# Altium PCB adapter.PcbDoc
Units mm, origin at the board's own origin, x right, y up, seen from the top; angles counter-clockwise.
Board outline 42 x 40 mm, 2 copper layers (Top Layer, Bottom Layer); 20 components, 28 nets, 117 pads, 31 vias.
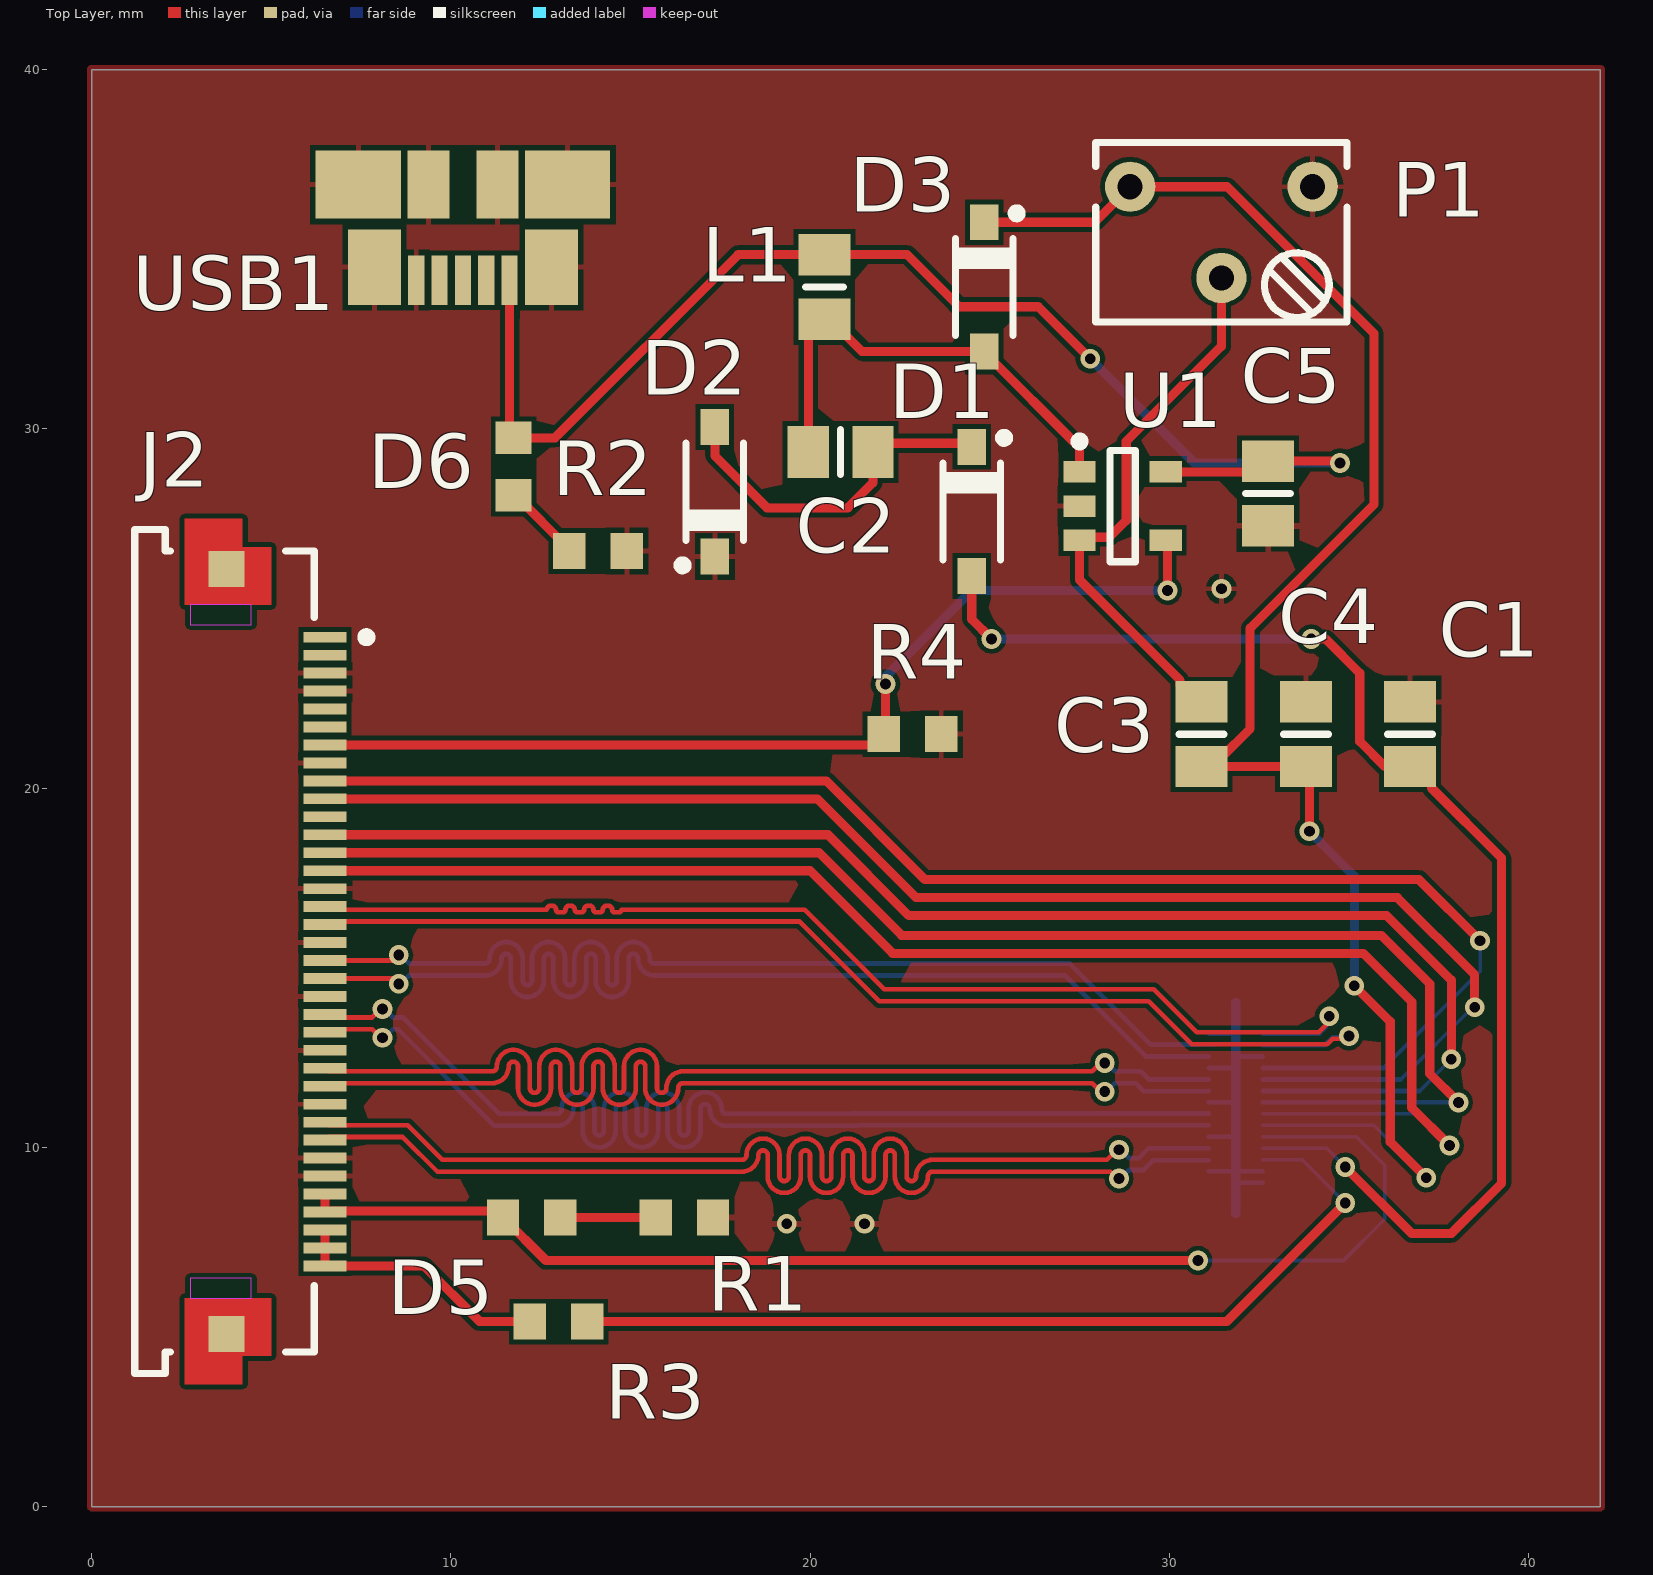
[diagram p0: Top Layer view]
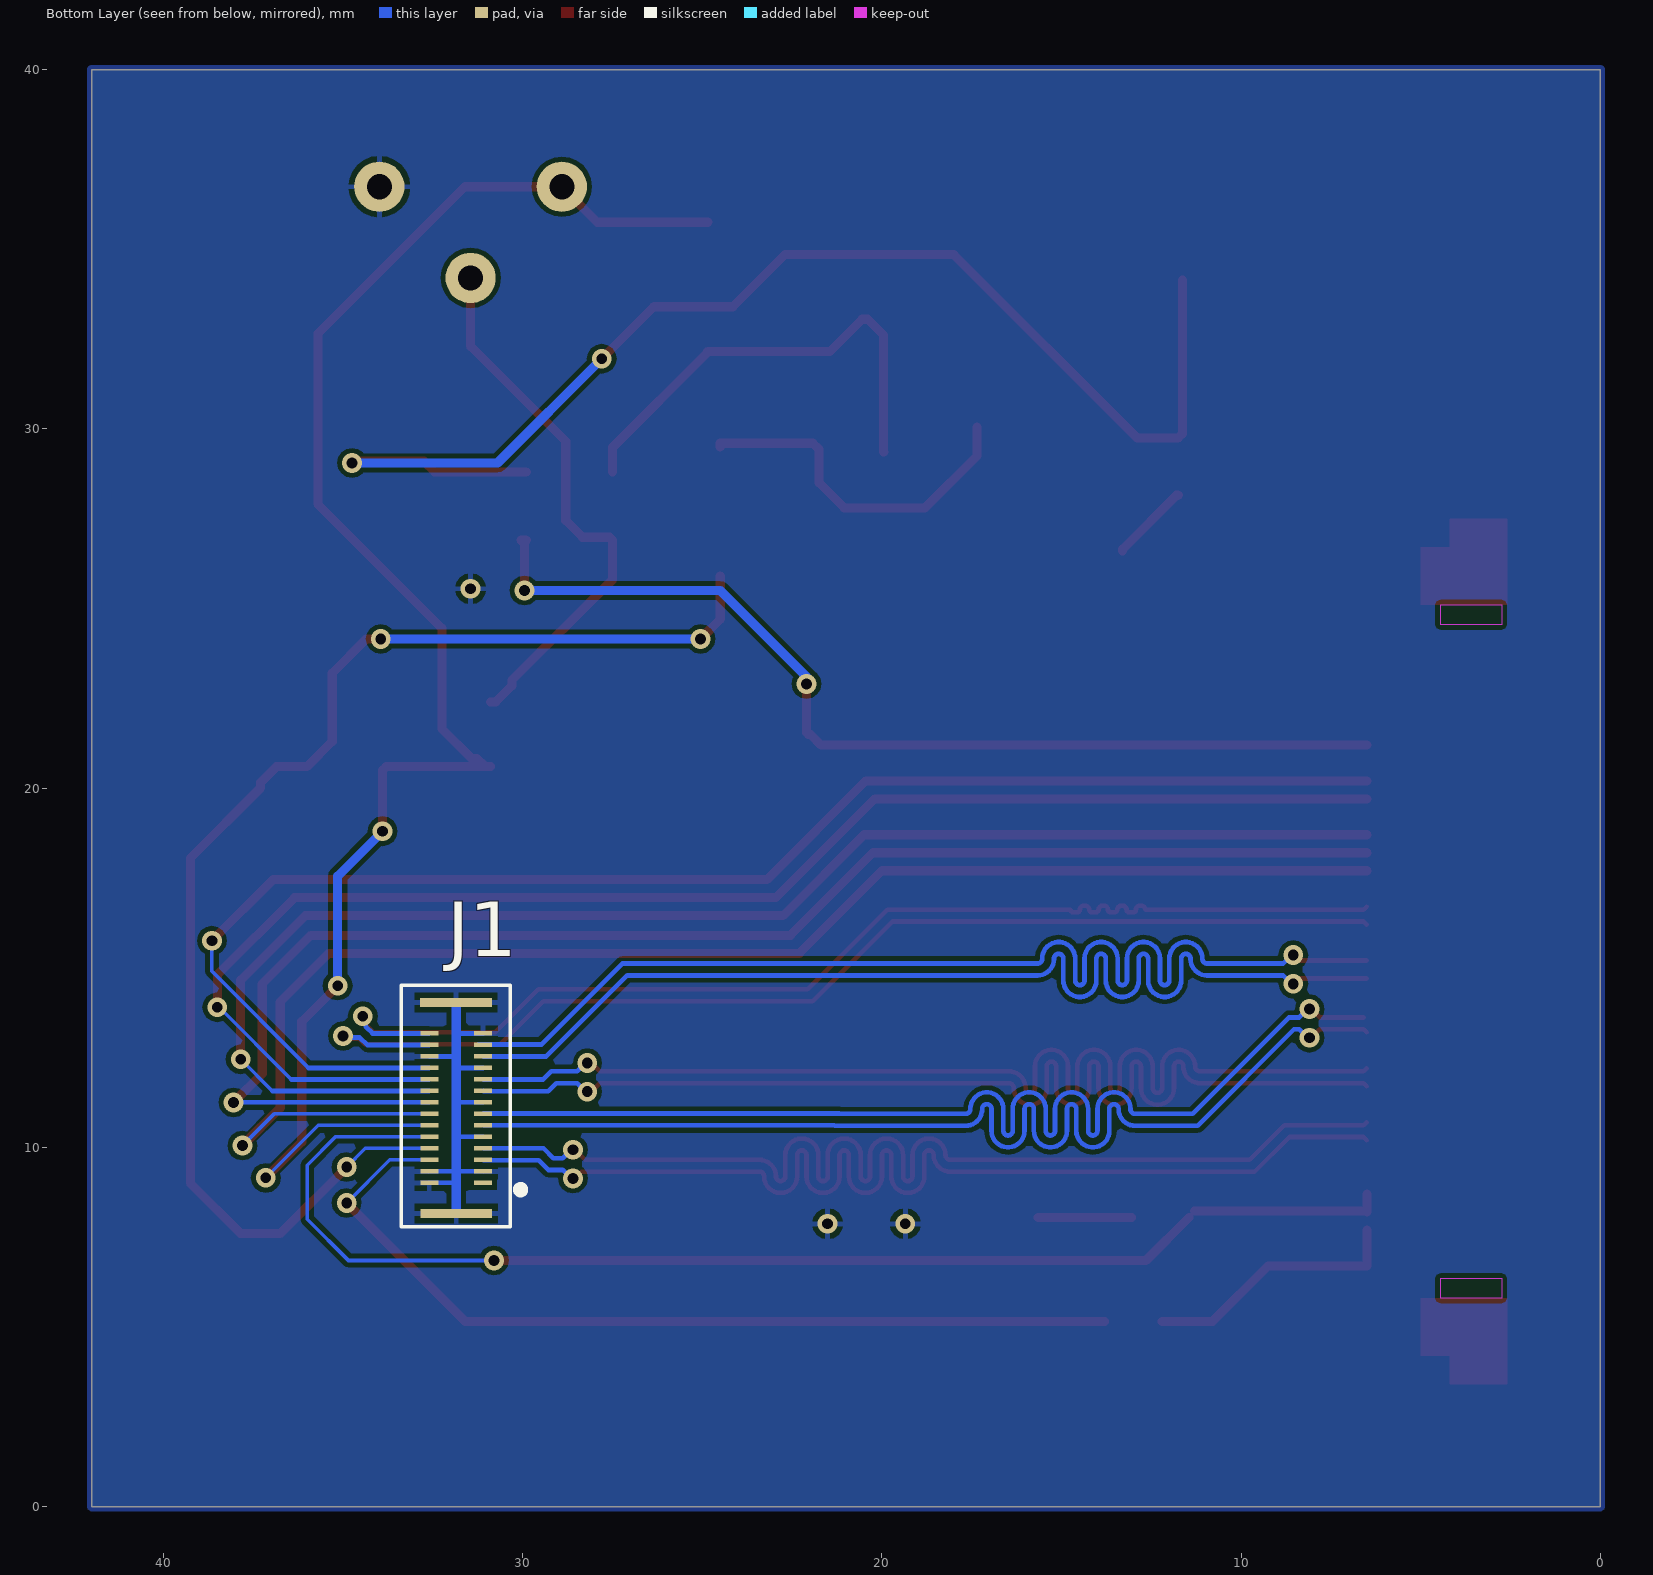
[diagram p1: Bottom Layer view, seen from below]
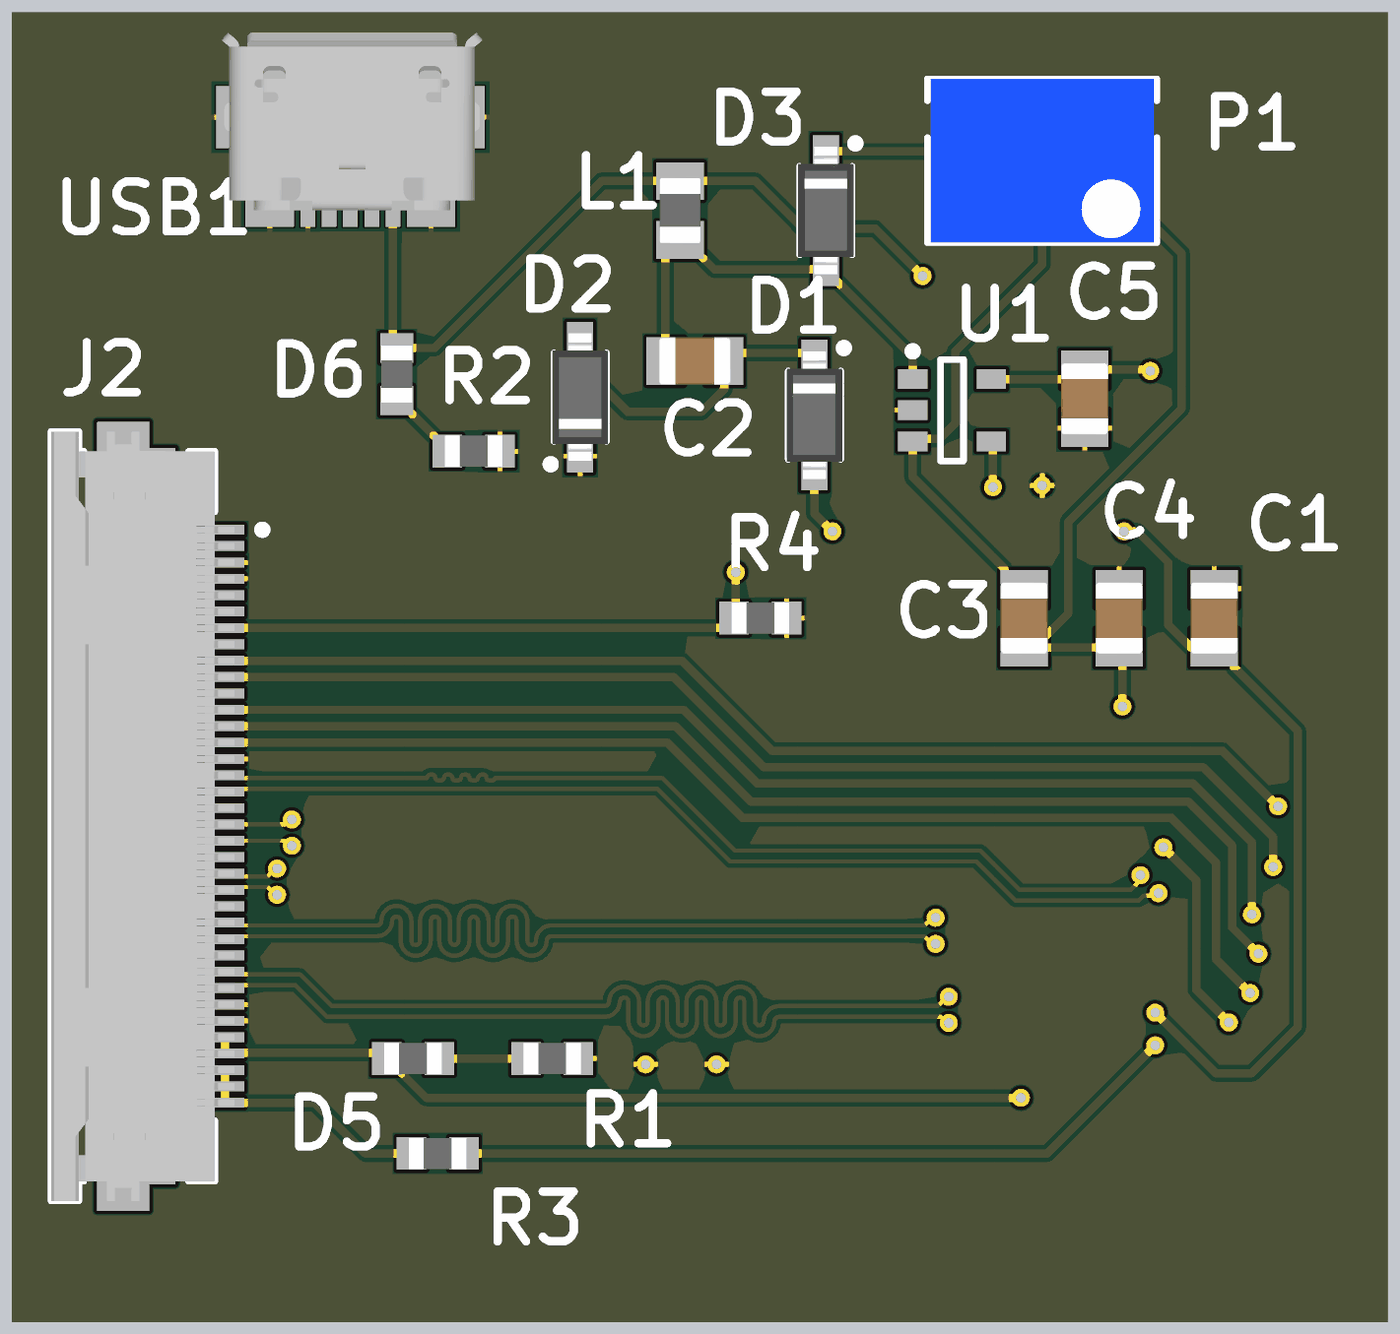
[diagram p2: 3D render of the assembled board from above, using the file's embedded part models]

## Layer stack, top to bottom
Top Solder: solder mask 0.0102, Solder Resist, Dk 3.5
Top Layer: signal copper 0.0356
Dielectric 1: dielectric 0.32, FR-4, Dk 4.8
Bottom Layer: signal copper 0.0356
Bottom Solder: solder mask 0.0102, Solder Resist, Dk 3.5

## Board outline
0,0 42,0 42,40 0,40

## Design rules (kind name [scope] priority, off if disabled: settings)
Clearance [All] p1: gap=0.13 ignorepadtopadclearanceinfootprint=FALSE
DiffPairsRouting [All] p1: maxlimit=0.254 minlimit=0.13 mostfreqgap=0.2 toplayer_minwidth=0.13 toplayer_maxwidth=0.14 toplayer_prefwidth=0.13 bottomlayer_minwidth=0.13 bottomlayer_maxwidth=0.14 bottomlayer_prefwidth=0.13 maxuncoupledlength=12.7
MatchedLengths global_rule [InDifferentialPairClass('All Differential Pairs')] p1: tolerance=0.5 checknetsindiffpair=FALSE checkdiffpairvsdiffpair=TRUE checkxsignals=TRUE checkothers=TRUE
MatchedLengths diff_pair_3 [InDifferentialPair('MIPI_TX_DATA3')] p2: tolerance=0.5 checknetsindiffpair=TRUE checkdiffpairvsdiffpair=FALSE checkxsignals=FALSE checkothers=FALSE
MatchedLengths diff_pair_4 [InDifferentialPair('MIPI_TX_DATA4')] p3: tolerance=0.5 checknetsindiffpair=TRUE checkdiffpairvsdiffpair=FALSE checkxsignals=FALSE checkothers=FALSE
MatchedLengths diff_pair_clk [InDifferentialPair('MIPI_TX_CLK')] p4: tolerance=0.5 checknetsindiffpair=TRUE checkdiffpairvsdiffpair=FALSE checkxsignals=FALSE checkothers=FALSE
MatchedLengths diff_pair_2 [InDifferentialPair('MIPI_TX_DATA2')] p5: tolerance=0.5 checknetsindiffpair=TRUE checkdiffpairvsdiffpair=FALSE checkxsignals=FALSE checkothers=FALSE
MatchedLengths diff_pair_1 [InDifferentialPair('MIPI_TX_DATA1')] p6: tolerance=0.5 checknetsindiffpair=TRUE checkdiffpairvsdiffpair=FALSE checkxsignals=FALSE checkothers=FALSE
MinimumSolderMaskSliver [All] p1: minsoldermaskwidth=0.05
PolygonConnect [All] p1: connectstyle=Relief reliefconductorwidth=0.15 reliefentries=4 polygonreliefangle="90 Angle" airgapwidth=0.15
RoutingVias [All] p1: holewidth=0.3 width=0.55 viastyle="Through Hole" minholewidth=0.3 minwidth=0.5 maxholewidth=0.3 maxwidth=0.7
SilkToSilkClearance [All] p1: silktosilkclearance=0.1
SilkToSolderMaskClearance [IsPad] p1: minsilkscreentomaskgap=0.1 clearancetoexposedcopper=TRUE
SolderMaskExpansion [All] p1: expansion=0.102
UnRoutedNet [All] p1: checkbadconnections=TRUE
Width signals [InNetClass('signals')] p1: maxlimit=0.3 minlimit=0.1 preferedwidth=0.13
Width diff_pairs [InNetClass('Differential_pairs')] p2: maxlimit=0.13 minlimit=0.13 preferedwidth=0.13
Width misc [InNetClass('misc')] p3: maxlimit=0.254 minlimit=0.1 preferedwidth=0.13
25 further rules are at their usual default settings.

## Classes and differential pairs
net class misc: +1.8 +3.3 +5 GND
net class Differential_pairs: MIPI_TX_CLK_N MIPI_TX_CLK_P MIPI_TX_DATA1_N MIPI_TX_DATA1_P MIPI_TX_DATA2_N MIPI_TX_DATA2_P MIPI_TX_DATA3_N MIPI_TX_DATA3_P MIPI_TX_DATA4_N MIPI_TX_DATA4_P
differential pair MIPI_TX_DATA4: +MIPI_TX_DATA4_P -MIPI_TX_DATA4_N
differential pair MIPI_TX_DATA3: +MIPI_TX_DATA3_P -MIPI_TX_DATA3_N
differential pair MIPI_TX_DATA2: +MIPI_TX_DATA2_P -MIPI_TX_DATA2_N
differential pair MIPI_TX_DATA1: +MIPI_TX_DATA1_P -MIPI_TX_DATA1_N
differential pair MIPI_TX_CLK: +MIPI_TX_CLK_P -MIPI_TX_CLK_N

## Components (designator, comment, footprint, x,y, rotation, side; value= is the part's Value field where it differs from the comment)
C1 "4.7uF" CAPC2013X145N 36.7,21.5 r270 top value=10nF
C2 "1uF" CAPC2013X145N 20.85,29.35 r0 top value=10nF
C3 "22pF" CAPC2013X145N 30.9,21.5 r270 top value=10nF
C4 "1uF" CAPC2013X145N 33.8,21.5 r270 top value=10nF
C5 "4.7uF" CAPC2013X145N 32.75,28.2 r90 top value=10nF
D1 "MBR0530T1G" SOD3715X145N 24.5,27.7 r270 top
D2 "MBR0530T1G" SOD3715X145N 17.35,28.25 r90 top
D3 "MBR0530T1G" SOD3715X145N 24.85,33.95 r270 top
D5 "15" RESC1608X55N 12.25,8.05 r0 top (schematic designator R5)
D6 "15" RESC1608X55N 11.75,28.95 r270 top (schematic designator R6)
J1 "AA22L-P028VA1" AA22L-P028VA1 30.14,15.9 r0 bottom
J2 "54132-3662" MOLX-54132-3662 5.125,15.45 r270 top
L1 "10uH" INDC2012X145N 20.4,33.95 r270 top value=4.7uH
P1 "500k" TRIM_VISHAY_T63YB 31.45,35.47 r180 top value=50k
R1 "15" RESC1608X55N 16.5,8.05 r0 top
R2 "15" RESC1608X55N 14.1,26.6 r0 top
R3 "15" RESC1608X55N 13,5.15 r0 top
R4 "100k" RESC1608X55N 22.85,21.5 r180 top value=15
U1 "TPS61040DBVR" TI-DBV5_L 28.7,27.85 r0 top
USB1 "Micro-B Receptacle" 47346-0001 10.338,36.8 r270 top

## Footprints (in the part's own frame and the unit in brackets; to place one, negate y for a bottom-side part, rotate by r counter-clockwise, add the part's x,y. Pads: shape width x height; smd on the part's side, far side on the other; paste and mask are expansions set on the pad)
47346-0001 [mm] "USB Micro-B Receptacle"
  rect 1.9x2.375 smd mask+0.051: 0(0,2.913) 0(0,-2.913)
  rect 1.9x1.175 smd mask+0.051: 0(0,0.962) 0(0,-0.962)
  rect 2.1x1.475 smd mask+0.051: 0(2.3,2.462) 0(2.3,-2.462)
  rect 1.38x0.45 smd mask+0.051: 1(2.66,1.3) 2(2.66,0.65) 3(2.66,0) 4(2.66,-0.65) 5(2.66,-1.3)
  body extent -2.59,-3.94 2.84,4.04, height 2.72
AA22L-P028VA1 [mm]
  rect 0.5x0.125 smd: 1(2.46,6.89) 2(0.96,6.89) 3(2.46,6.57) 4(0.96,6.57) 5(2.46,6.25) 6(0.96,6.25) 7(2.46,5.93) 8(0.96,5.93) 9(2.46,5.61) 10(0.96,5.61) 11(2.46,5.29) 12(0.96,5.29) 13(2.46,4.97) 14(0.96,4.97) 15(2.46,4.65) 16(0.96,4.65) 17(2.46,4.33) 18(0.96,4.33) 19(2.46,4.01) 20(0.96,4.01) 21(2.46,3.69) 22(0.96,3.69) 23(2.46,3.37) 24(0.96,3.37) 25(2.46,3.05) 26(0.96,3.05) 27(2.46,2.73) 28(0.96,2.73)
  rect 2x0.25 smd: 29(1.72,1.87) 30(1.71,7.74)
  silkscreen extent -0.17,1.39 3.24,8.11, body extent -0.33,3.51 -0.33,3.51, height 0.25
CAPC2013X145N [mm] "Capacitor, Non-Polarized, Chip; 2.00mm L X 1.25mm W X 1.45mm H, IPC Medium Density"
  rect 1.15x1.45 smd: 1(-0.9,0) 2(0.9,0)
  silkscreen extent 0,-0.63 0,0.63, body extent -1.1,-0.72 1.1,0.73, height 1.45
INDC2012X145N [mm] "Chip Inductor, EIA 0805, Metric 2012, Body 2.0x1.25mm, IPC Medium Density"
  rect 1.15x1.45 smd: 1(-0.9,0) 2(0.9,0)
  silkscreen extent 0,-0.53 0,0.53, body extent -1,-0.62 1,0.63, height 1.45
MOLX-54132-3662 [mm] "FPC Connector, 36-Leads, Right Angle, Pitch 0.5 mm, Mated Height 2.0 mm, SMT"
  rect 0.3x1.2 smd: 1(-8.75,1.375) 2(-8.25,1.375) 3(-7.75,1.375) 4(-7.25,1.375) 5(-6.75,1.375) 6(-6.25,1.375) 7(-5.75,1.375) 8(-5.25,1.375) 9(-4.75,1.375) 10(-4.25,1.375) 11(-3.75,1.375) 12(-3.25,1.375) 13(-2.75,1.375) 14(-2.25,1.375) 15(-1.75,1.375) 16(-1.25,1.375) 17(-0.75,1.375) 18(-0.25,1.375) 19(0.25,1.375) 20(0.75,1.375) 21(1.25,1.375) 22(1.75,1.375) 23(2.25,1.375) 24(2.75,1.375) 25(3.25,1.375) 26(3.75,1.375) 27(4.25,1.375) 28(4.75,1.375) 29(5.25,1.375) 30(5.75,1.375) 31(6.25,1.375) 32(6.75,1.375) 33(7.25,1.375) 34(7.75,1.375) 35(8.25,1.375) 36(8.75,1.375)
  rect 1x1 smd: MP1(-10.65,-1.375) MP2(10.65,-1.375)
  Top Layer region: -9.65,-0.125 -11.25,-0.125 -11.25,-0.925 -12.05,-0.925 -12.05,-2.525 -9.65,-2.525
  Top Layer region: 9.65,-0.125 11.25,-0.125 11.25,-0.925 12.05,-0.925 12.05,-2.525 9.65,-2.525
  Keep-Out Layer region: -9.1,-0.675 -9.65,-0.675 -9.65,-2.375 -9.1,-2.375
  Keep-Out Layer region: 9.1,-2.375 9.65,-2.375 9.65,-0.675 9.1,-0.675
  silkscreen extent -11.75,-3.93 11.75,2.65, body extent -11.75,-3.92 11.75,1.68, height 2
RESC1608X55N [mm] "Chip Resistor, EIA 0603, Metric 1608, Body 1.6x0.8mm, IPC Medium Density"
  rect 0.9x1 smd: 1(-0.8,0) 2(0.8,0)
  body extent -0.87,-0.47 0.88,0.48, height 0.55
SOD3715X145N [mm] "SOD Diode (SOD-123); 2.70mm W X 1.55mm L X 1.45mm H body, IPC Medium Density"
  rect 1x0.8 smd: 1(-1.8,0) 2(1.8,0)
  silkscreen extent -2.17,-0.8 1.35,1.03, body extent -1.95,-0.85 1.95,0.85, height 1.45
TI-DBV5_L [mm] "SOT23, 5-Leads, Body 2.9x1.6mm, Pitch 0.95mm, IPC High Density"
  rect 0.9x0.6 smd: 1(-1.2,0.95) 2(-1.2,0) 3(-1.2,-0.95) 4(1.2,-0.95) 5(1.2,0.95)
  silkscreen extent -1.32,-1.55 0.35,1.92, body extent -0.87,-1.52 0.87,1.53, height 1.45
TRIM_VISHAY_T63YB [mm] "Trimming Potentiometer VISHAY T63YB Series (Top Adjustment)"
  round 1.4 hole 0.7: 1(-2.54,-1.27) 2(0,1.27) 3(2.54,-1.27)
  silkscreen extent -3.5,-2.5 3.5,2.5, body extent -3.4,-2.5 3.4,2.5, height 7.5

## Part data
C1 C2 C3 C4 C5: library part CC0805_10NF_500V_10%_X7R_YAGEO_MID-VOLTAGE, "Non-polarised capacitor", Case=0805, Manufacturer=YAGEO, Manufacturer Part Number="222297015636 or CC0805KKX7RBBB103", Tolerance=±10%, Voltage=500V, Author="CERN DEM JLC", ComponentHeight=1.45mm, Component Type=Standard, CreateDate=18.06.2013, HelpURL=\\cern.ch\dfs\Applications\Altium\Datasheets\CC0805_NP0X7R_MID-VOLTAGE_100-to-630V.pdf, LatestRevisionDate=22.02.2016, Mounted=Yes, Part Description="SMD Multilayer Chip Ceramic Capacitor", Part Number=CC0805_10NF_500V_10%_X7R_YAGEO_MID-VOLTAGE, Pin Count=2, Sense=No, SMD=Yes, Socket=No, Status=Preferred, TC=X7R
D1 D2 D3: "Schottky Diode", Case=SOD-123, Manufacturer="ON SEMICONDUCTOR", Power=500mA, Voltage=30V, Author="CERN DEM JLC", Bonding=No, ComponentHeight=1.45mm, Component Type=Standard, CreateDate=21.07.2010, Device=MBR0530T1G, HelpURL=\\cern.ch\dfs\Applications\Altium\Datasheets\MBR0530T1G.pdf, LatestRevisionDate=21.07.2010, Manufacturer Part Number=MBR0530T1G, Mounted=Yes, PackageDescription="SOD Diode (SOD-123); 2.70mm W X 1.55mm L X 1.45mm H body, IPC Medium Density", Part Description="Schottky Power Rectifier", Part Number=MBR0530T1G, Pin Count=2, PressFit=No, Sense=No, SMD=Yes, Socket=No
D5 D6 R1 R2 R3 R4: library part R0603_15R_1%_0.1W_100PPM, "Resistor - 1%", Case=0603, Manufacturer=GENERIC, Manufacturer1 ComponentHeight=0.55mm, Manufacturer1 Example="NIC COMPONENT", Manufacturer1 Part Number=NRC06F15R0TRF, Power=0.1W, Tolerance=±1%, Author="CERN DEM JLC", Component Type=Standard, CreateDate=03.12.2007, HelpURL=\\cern.ch\dfs\Applications\Altium\Datasheets\R0603_NIC_NRC.pdf, LatestRevisionDate=13.03.2008, Manufacturer Part Number=R0603_15R_1%_0.1W_100PPM, Mounted=Yes, Part Description="General Purpose Thick Film Chip Resistor", Part Number=R0603_15R_1%_0.1W_100PPM, Pin Count=2, PressFit=No, Sense=No, SMD=Yes, Socket=No, Status=Preferred, TC=±100ppm/°C
J2: "0.5 mm Pitch Easy-On(TM) Type FPC Connector, 2.0 mm Mated Height, Right Angle, ZIF, SMT, Bottom Contact, 36 Circuits, -20 to 85 degC, ELV and RoHS Compliant, Tape and Reel", Current (Max per Contact)=0.5A, Manufacturer=Molex, Supplier Part Number 1=538-54132-3662, Voltage (Max)=50V, Circuits (Loaded)=36, ComponentLink1Description="Manufacturer URL", ComponentLink1URL=http://www.molex.com/molex/index.jsp, ComponentLink2Description=Datasheet, ComponentLink2URL=http://www.molex.com/webdocs/datasheets/pdf/en-us/0541323662_FFC_FPC_CONNECTORS.pdf, ComponentLink3Description="Package Specification", ComponentLink3URL=http://www.molex.com/pdm_docs/sd/541323662_sd.pdf, Contact Position=Bottom, Durability (mating cycles max)=20, Entry Angle="90degrees Angle", Mated Height=2.00mm, Material - Metal="Phosphor Bronze", Material - Plating Mating=Gold, Material - Plating Termination=Gold, Mounting Technology="Surface Mount", Number of Rows=1, Orientation="Right Angle", PackageDescription="36-Lead FPC Connector, Pitch 0.5 mm", PackageReference=54132-3662, PackageVersion="Rev. F, 07/2010", Packing="Tape and Reel", PartNumber=54132-3662, PCB Locator=No, PCB Retention=Yes, Pitch - Mating Interface=0.50mm, Polarized to PCB=Yes, RoHS=TRUE, Stackable=No, Supplier 1=Mouser
L1: library part IND0805_4.7UH_20%_TAIYO-YUDEN_CB, "Inductor With Core", Case=0805, Manufacturer="TAIYO YUDEN", Manufacturer Part Number=CB2012T4R7M, Power=300mA, Resistance=0.4R, Tolerance=±20%, Author="CERN DEM JLC", ComponentHeight=1.45mm, Component Type=Standard, CreateDate=15.11.2010, HelpURL=\\cern.ch\dfs\Applications\Altium\Datasheets\IND0805_TAIYO-YUDEN_CB.pdf, LatestRevisionDate=15.11.2010, Mounted=Yes, Part Description="Wound Chip Power Inductors (CB Series)", Part Number=IND0805_4.7UH_20%_TAIYO-YUDEN_CB, Pin Count=2, Sense=No, SMD=Yes, Socket=No, Status=None
P1: library part TRIM_14T_50K_VISHAY_T63YB503KT20, "Trimming Potentiometer", Case=T63YB, Manufacturer="VISHAY SFERNICE", Manufacturer Part Number=T63YB503KT20, Power=0.25W, Tolerance=±10%, Author="CERN DEM JLC", ComponentHeight=7.7mm, Component Type=Standard, CreateDate=30.03.2011, HelpURL=\\cern.ch\dfs\Applications\Altium\Datasheets\TRIM_VISHAY_T63YB.pdf, LatestRevisionDate=28.11.2012, Mounted=Yes, Part Description="14 Turn Trimming Potentiometer  (Top Adjustement)", Part Number=TRIM_14T_50K_VISHAY_T63YB503KT20, Pin Count=3, PressFit=No, Sense=No, SMD=No, Socket=No, TC=±100ppm/°C
U1: "28 V, 400 mA Switch Boost Converter for White LED Applications, 1.8 to 6 V, -40 to 85 degC, 5-pin SOT23 (DBV5), Green (RoHS & no Sb/Br)", Manufacturer="Texas Instruments", Rating=Catalog, Supplier Part Number 1=296-12685-2-ND, Switching Frequency(Max)(kHz)=1000, Code_JEDEC=MO-178, ComponentLink1Description="Manufacturer URL", ComponentLink1URL=http://www.ti.com/, ComponentLink2Description=Datasheet, ComponentLink2URL=http://www.ti.com/general/docs/lit/getliterature.tsp?genericPartNumber=TPS61040&fileType=pdf, ComponentLink3Description="Package Specification", ComponentLink3URL=http://www.ti.com/litv/pdf/mpds018i, DatasheetVersion=SLVS413F, Dimming=TRUE, Eco-Plan="Green (RoHS & no Sb/Br)", Iout(Max)(A)=0.09, Iq(Typ)(mA)=0.028, Mounting Technology="Surface Mount", PackageDescription="5-Pin Plastic Small Outline, Body 1.60 × 2.90 mm, Pitch 0.95 mm", PackageReference=DBV5, PackageVersion=4073253-4/K, PartNumber=TPS61040DBVR, SubFamily="White LED Driver", Supplier 1=Digi-Key, Supplier 2=Digi-Key, Supplier 3=Digi-Key, Supplier 4=Farnell, Supplier 5=Farnell, Supplier 6=Newark, Supplier 7=Mouser, Supplier Part Number 2=296-12685-1-ND, Supplier Part Number 3=296-12685-6-ND, Supplier Part Number 4=1461061, Supplier Part Number 5=1461061RL, Supplier Part Number 6=35K1326, Supplier Part Number 7=595-TPS61040DBVR, Topology=Boost, Vin(Max)(V)=6, Vin(Min)(V)=1.8
USB1: "47346-0001"

## Via types
v1: diameter 0.55, hole 0.3, Top Layer to Bottom Layer, 31 vias

## Nets (pads, with @x,y where several pads share a name; then routed paths per layer and width w, separated by ;. In a path a pad name is that pad's centre, name@x,y a point inside that pad or via, vN(x,y) a via of type N, cw(c..) or ccw(c..) an arc to the next point about the centre after c; other vN are vias at no path point)
+1.8: D5.1 J1.9 J2.32 J2.33 | length 36.1
  Top Layer w0.254: J2.32 J2.33 6.523,8.223 D5.1@11.3,8.223 ; D5.1 12.65,6.85 v1(30.8,6.85)
  Bottom Layer w0.1: v1(30.8,6.85) 34.85,6.85 36,8 36,9.5 35.21,10.29 J1.9
+3.3: J2.34 J2.35 J2.36 R3.1 | length 7.3
  Top Layer w0.254: J2.34 J2.35 J2.36 9.25,6.7 10.8,5.15 R3.1
+5: C5.2 D6.1 L1.1 U1.5 USB1.1 | length 36.9
  Top Layer w0.254: USB1.1 11.637,29.863 D6.1 12.9,29.75 18,34.85 L1.1 22.7,34.85 24.15,33.4 26.35,33.4 v1(27.8,31.95) ; U1.5 32.45,28.8 C5.2 34.7,29.1 v1(34.75,29.05)
  Bottom Layer w0.254: v1(27.8,31.95) 30.7,29.05 v1(34.75,29.05)
GND: C1.1 C4.1 C5.1 D2.1 J1.1 J1.3 J1.4 J1.10 J1.16 J1.22 J1.23 J1.28 J1.29 J1.30 J2.3 J2.4 J2.8 J2.15 J2.18 J2.21 J2.24 J2.27 J2.30 J2.31 P1.1 R1.2 R2.2 R4.1 U1.2 USB1.0 USB1.5 | length 11.9
  Bottom Layer w0.13: J1.4 31.85,9.33 J1.3 ; J1.10 31.84,10.29 31.85,10.3 ; J1.16 31.85,11.25 ; J1.22 31.84,12.21 31.85,12.2 ; J1.28 31.83,13.17 31.85,13.15 ; 31.85,9.05 31.89,9.01 J1.1 ; 31.85,12.55 31.87,12.53 J1.23
  Bottom Layer w0.254: J1.30 31.85,9.05 31.85,9.33 31.85,10.3 31.85,11.25 31.85,12.2 31.85,12.55 31.85,13.15 31.85,14.028 31.852,14.03 J1.29
  other v1: 19.349,7.87 21.514,7.87 31.45,25.55
LCD_BL_CA_CONN: J1.5 R3.2 | length 25.3
  Top Layer w0.254: R3.2 31.6,5.15 v1(34.9,8.45)
  Bottom Layer w0.1: J1.5 33.7,9.65 v1(34.9,8.45)
LCD_ENABLE: J2.7 R4.2 U1.4 | length 27.7
  Top Layer w0.254: J2.7 21.7,21.2 R4.2@22,21.5 ; R4.2 22.1,21.55 v1(22.1,22.9) ; U1.4 30.05,26.9 29.95,26.8 v1(29.95,25.5)
  Bottom Layer w0.254: v1(22.1,22.9) 22.1,23.1 24.5,25.5 v1(29.95,25.5)
LCD_HIFA_BSYNC_CONN: J1.17 J2.12 | length 40.8
  Top Layer w0.254: J2.12 20.5,18.7 22.75,16.45 36.05,16.45 37.85,14.65 v1(37.85,12.45)
  Bottom Layer w0.1: 36.97,11.57 v1(37.85,12.45)
  Bottom Layer w0.13: J1.17 36.97,11.57
LCD_PANIC_L_CONN: J1.19 J2.10 | length 41.7
  Top Layer w0.254: J2.10 20.2,19.7 22.95,16.95 36.35,16.95 38.5,14.8 v1(38.5,13.9)
  Bottom Layer w0.1: 36.44,11.89 v1@38.45,13.9
  Bottom Layer w0.13: J1.19 36.44,11.89
  Bottom Layer w0.254: v1@38.45,13.9 v1(38.5,13.9)
LCD_PIFA: J1.15 J2.13 | length 41.3
  Top Layer w0.254: J2.13 20.25,18.2 22.55,15.9 35.9,15.9 37.25,14.55 37.25,12.05 v1(38.05,11.25)
  Bottom Layer w0.13: J1.15 v1(38.05,11.25)
LCD_PWR_EN_CONN: J1.13 J2.14 | length 41.8
  Top Layer w0.254: J2.14 20,17.7 22.3,15.4 35.4,15.4 36.75,14.05 36.75,11.1 v1(37.8,10.05)
  Bottom Layer w0.1: J1.13 36.92,10.93 v1(37.8,10.05)
LCD_RESET_L_CONN: J1.21 J2.9 | length 42
  Top Layer w0.254: J2.9 20.45,20.2 23.2,17.45 36.95,17.45 v1(38.65,15.75)
  Bottom Layer w0.1: 35.96,12.21 38.65,14.9 v1(38.65,15.75)
  Bottom Layer w0.13: J1.21 35.96,12.21
MIPI_TX_CLK_N: J1.20 J2.25 | length 32.2
  Top Layer w0.13: J2.25 6.585,12.115 7.111,12.115 11.15,12.115 ccw(c11.15,12.245) 11.28,12.245 ; 11.28,12.255 cw(c11.74,12.255) 12.2,12.255 12.2,11.645 ccw(c12.33,11.645) 12.46,11.645 12.46,12.255 cw(c12.92,12.255) 13.38,12.255 13.38,11.645 ccw(c13.51,11.645) 13.64,11.645 13.64,12.255 cw(c14.1,12.255) 14.56,12.255 14.56,11.645 ccw(c14.69,11.645) 14.82,11.645 14.82,12.255 cw(c15.28,12.255) 15.74,12.255 15.74,11.645 ccw(c15.87,11.645) 16,11.645 ; 16,11.655 cw(c16.46,11.655) 16.46,12.115 27.851,12.115 28.086,12.35 v1(28.2,12.35)
  Bottom Layer w0.13: v1(28.2,12.35) 28.251,12.35 28.486,12.115 29.2,12.115 29.425,11.89 J1.20
MIPI_TX_CLK_P: J1.18 J2.26 | length 32.2
  Top Layer w0.13: J2.26 6.585,11.785 7.111,11.785 11.15,11.785 ccw(c11.15,12.245) 11.61,12.245 ; 11.61,12.255 cw(c11.74,12.255) 11.87,12.255 11.87,11.645 ccw(c12.33,11.645) 12.79,11.645 12.79,12.255 cw(c12.92,12.255) 13.05,12.255 13.05,11.645 ccw(c13.51,11.645) 13.97,11.645 13.97,12.255 cw(c14.1,12.255) 14.23,12.255 14.23,11.645 ccw(c14.69,11.645) 15.15,11.645 15.15,12.255 cw(c15.28,12.255) 15.41,12.255 15.41,11.645 ccw(c15.87,11.645) 16.33,11.645 ; 16.33,11.655 cw(c16.46,11.655) 16.46,11.785 27.851,11.785 28.086,11.55 v1(28.2,11.55)
  Bottom Layer w0.13: v1(28.2,11.55) 28.251,11.55 28.486,11.785 29.065,11.785 29.29,11.56 31.09,11.56 J1.18
MIPI_TX_DATA1_N: J1.8 J2.28 | length 32.6
  Top Layer w0.13: J2.28 6.585,10.615 7.111,10.615 8.802,10.615 9.765,9.652 18.1,9.652 ccw(c18.1,9.782) 18.23,9.782 ; 18.23,9.784 cw(c18.69,9.784) 19.15,9.784 19.15,9.189 ccw(c19.28,9.189) 19.41,9.189 19.41,9.784 cw(c19.87,9.784) 20.33,9.784 20.33,9.189 ccw(c20.46,9.189) 20.59,9.189 20.59,9.784 cw(c21.05,9.784) 21.51,9.784 21.51,9.189 ccw(c21.64,9.189) 21.77,9.189 21.77,9.784 cw(c22.23,9.784) 22.69,9.784 22.69,9.189 ccw(c22.82,9.189) 22.95,9.189 ; 22.95,9.192 cw(c23.41,9.192) 23.41,9.652 28.266,9.652 28.549,9.935 v1(28.6,9.935)
  Bottom Layer w0.13: v1(28.6,9.935) 28.651,9.935 28.886,9.7 29.15,9.7 29.42,9.97 J1.8
MIPI_TX_DATA1_P: J1.6 J2.29 | length 32.5
  Top Layer w0.13: J2.29 6.585,10.285 7.111,10.285 8.665,10.285 9.628,9.322 18.1,9.322 ccw(c18.1,9.782) 18.56,9.782 ; 18.56,9.784 cw(c18.69,9.784) 18.82,9.784 18.82,9.189 ccw(c19.28,9.189) 19.74,9.189 19.74,9.784 cw(c19.87,9.784) 20,9.784 20,9.189 ccw(c20.46,9.189) 20.92,9.189 20.92,9.784 cw(c21.05,9.784) 21.18,9.784 21.18,9.189 ccw(c21.64,9.189) 22.1,9.189 22.1,9.784 cw(c22.23,9.784) 22.36,9.784 22.36,9.189 ccw(c22.82,9.189) 23.28,9.189 ; 23.28,9.192 cw(c23.41,9.192) 23.41,9.322 28.362,9.322 28.549,9.135 v1(28.6,9.135)
  Bottom Layer w0.13: v1(28.6,9.135) 28.651,9.135 28.886,9.37 29.287,9.37 29.557,9.64 J1.6@31.1,9.64
  other v1: 28.6,9.135
MIPI_TX_DATA2_N: J1.14 J2.22 | length 32.2
  Top Layer w0.13: J2.22@6.585,13.615 7.111,13.615 7.606,13.615 7.814,13.615 8.049,13.85 v1(8.1,13.85)
  Bottom Layer w0.13: v1(8.1,13.85) 8.151,13.85 8.386,13.615 8.666,13.615 11.351,10.93 12.95,10.93 ccw(c12.95,11.06) 13.08,11.06 ; 13.08,11.07 cw(c13.54,11.07) 14,11.07 14,10.46 ccw(c14.13,10.46) 14.26,10.46 14.26,11.07 cw(c14.72,11.07) 15.18,11.07 15.18,10.46 ccw(c15.31,10.46) 15.44,10.46 15.44,11.07 cw(c15.9,11.07) 16.36,11.07 16.36,10.46 ccw(c16.49,10.46) 16.62,10.46 16.62,11.07 cw(c17.08,11.07) 17.54,11.07 ; 17.54,11.06 ccw(c17.67,11.06) 17.67,10.93 21.181,10.93 21.191,10.94 31.09,10.94 J1.14
MIPI_TX_DATA2_P: J1.12 J2.23 | length 32.3
  Top Layer w0.13: J2.23 6.585,13.285 7.469,13.285 7.814,13.285 8.049,13.05 v1(8.1,13.05)
  Bottom Layer w0.13: v1(8.1,13.05) 8.151,13.05 8.386,13.285 8.53,13.285 11.215,10.6 12.95,10.6 ccw(c12.95,11.06) 13.41,11.06 ; 13.41,11.07 cw(c13.54,11.07) 13.67,11.07 13.67,10.46 ccw(c14.13,10.46) 14.59,10.46 14.59,11.07 cw(c14.72,11.07) 14.85,11.07 14.85,10.46 ccw(c15.31,10.46) 15.77,10.46 15.77,11.07 cw(c15.9,11.07) 16.03,11.07 16.03,10.46 ccw(c16.49,10.46) 16.95,10.46 16.95,11.07 cw(c17.08,11.07) 17.21,11.07 ; 17.21,11.06 ccw(c17.67,11.06) 17.67,10.6 21.317,10.6 21.327,10.61 J1.12
MIPI_TX_DATA3_N: J1.26 J2.19 | length 32.2
  Top Layer w0.13: J2.19 8.4,15.2 v1(8.55,15.35)
  Bottom Layer w0.13: v1(8.55,15.35) 8.601,15.35 8.836,15.115 9.701,15.115 10.95,15.115 ccw(c10.95,15.245) 11.08,15.245 ; 11.08,15.255 cw(c11.54,15.255) 12,15.255 12,14.645 ccw(c12.13,14.645) 12.26,14.645 12.26,15.255 cw(c12.72,15.255) 13.18,15.255 13.18,14.645 ccw(c13.31,14.645) 13.44,14.645 13.44,15.255 cw(c13.9,15.255) 14.36,15.255 14.36,14.645 ccw(c14.49,14.645) 14.62,14.645 14.62,15.255 cw(c15.08,15.255) 15.54,15.255 ; 15.54,15.245 ccw(c15.67,15.245) 15.67,15.115 27.223,15.115 29.478,12.86 J1.26@31.237,12.86
MIPI_TX_DATA3_P: J1.24 J2.20 | length 32
  Top Layer w0.13: J2.20 8.4,14.7 v1(8.55,14.55)
  Bottom Layer w0.13: v1(8.55,14.55) 8.601,14.55 8.836,14.785 9.701,14.785 10.95,14.785 ccw(c10.95,15.245) 11.41,15.245 ; 11.41,15.255 cw(c11.54,15.255) 11.67,15.255 11.67,14.645 ccw(c12.13,14.645) 12.59,14.645 12.59,15.255 cw(c12.72,15.255) 12.85,15.255 12.85,14.645 ccw(c13.31,14.645) 13.77,14.645 13.77,15.255 cw(c13.9,15.255) 14.03,15.255 14.03,14.645 ccw(c14.49,14.645) 14.95,14.645 14.95,15.255 cw(c15.08,15.255) 15.21,15.255 ; 15.21,15.245 ccw(c15.67,15.245) 15.67,14.785 27.087,14.785 29.342,12.53 J1.24
MIPI_TX_DATA4_N: J1.27 J2.16 | length 32.7
  Top Layer w0.13: J2.16 6.585,16.615 7.111,16.615 12.6,16.615 12.67,16.615 cw(c12.78,16.615) 12.78,16.725 12.82,16.725 cw(c12.82,16.615) 12.93,16.615 ccw(c13,16.615) 13,16.545 13.119,16.545 ccw(c13.119,16.615) 13.19,16.615 cw(c13.3,16.615) 13.3,16.725 13.34,16.725 cw(c13.34,16.615) 13.45,16.615 ccw(c13.52,16.615) 13.52,16.545 13.639,16.545 ccw(c13.639,16.615) 13.71,16.615 cw(c13.82,16.615) 13.82,16.725 13.86,16.725 cw(c13.86,16.615) 13.97,16.615 ccw(c14.04,16.615) 14.04,16.545 14.159,16.545 ccw(c14.159,16.615) 14.23,16.615 cw(c14.34,16.615) 14.34,16.725 14.38,16.725 cw(c14.38,16.615) 14.49,16.615 ccw(c14.56,16.615) 14.56,16.545 14.679,16.545 ccw(c14.679,16.615) 14.75,16.615 14.88,16.615 19.852,16.615 22.067,14.4 29.567,14.4 30.767,13.2 34.157,13.2 34.45,13.493 v1(34.45,13.65)
  Bottom Layer w0.13: J1.27 34.18,13.17 34.37,13.36 34.37,13.57 v1(34.45,13.65)
MIPI_TX_DATA4_P: J1.25 J2.17 | length 32.5
  Top Layer w0.13: J2.17 6.585,16.285 15.1,16.285 15.7,16.285 19.715,16.285 21.93,14.07 29.43,14.07 30.63,12.87 34.396,12.87 34.546,13.02 34.92,13.02 v1(35,13.1)
  Bottom Layer w0.13: J1.25 34.326,12.85 34.532,13.056 34.956,13.056 v1(35,13.1)
NetC2_1: C2.1 D3.2 L1.2 U1.1 | length 13.2
  Top Layer w0.254: C2.1 19.952,29.352 19.952,32.602 L1.2 20.55,33.05 21.45,32.15 D3.2 24.85,32.131 27.5,29.481 U1.1
NetC2_2: C2.2 D1.1 D2.2 | length 9.9
  Top Layer w0.254: D2.2 17.35,29.25 18.8,27.8 21.05,27.8 21.75,28.5 C2.2 21.75,29.425 21.925,29.6 24.5,29.6 D1.1
NetC3_1: C3.1 P1.2 U1.3 | length 15.4
  Top Layer w0.254: C3.1 30.75,22.4 30.302,22.848 30.302,22.998 27.5,25.8 U1.3 27.581,26.981 28.331,26.981 28.8,27.45 28.8,29.65 31.45,32.3 P1.2
NetR1_1: D5.2 R1.1 | length 2.6
  Top Layer w0.254: D5.2 R1.1@15.65,8.05
NetR2_1: D6.2 R2.1 | length 2.2
  Top Layer w0.254: D6.2 11.8,28.15 13.3,26.65 R2.1
PN5V7_AVDDN_CONN: C1.2 D1.2 J1.7 | length 37.2
  Top Layer w0.254: D1.2 24.5,24.7 v1(25.05,24.15) ; v1(33.95,24.15) 34.35,24.15 35.3,23.2 35.3,21.3 36,20.6 C1.2 36.85,20.6 37.298,20.152 37.298,20.002 39.25,18.05 39.25,9 37.85,7.6 36.75,7.6 v1(34.9,9.45)
  Bottom Layer w0.1: J1.7 34.38,9.97 v1(34.9,9.45)
  Bottom Layer w0.254: v1(25.05,24.15) v1(33.95,24.15)
PP5V7_AVDDH_CONN: C3.2 C4.2 D3.1 J1.11 P1.3 | length 47.9
  Top Layer w0.254: D3.1 27.92,35.75 P1.3 31.61,36.74 35.7,32.65 35.7,27.9 32.25,24.45 32.25,21.65 31.425,20.825 31.275,20.825 C3.2@31.05,20.6 ; C3.2 C3.2@31.05,20.6 ; v1(33.9,18.8) 33.9,20.5 C4.2 C3.2@31.05,20.6 ; v1(35.15,14.5) 36.15,13.5 36.15,10.15 v1(37.15,9.15)
  Bottom Layer w0.1: J1.11 35.69,10.61 v1(37.15,9.15)
  Bottom Layer w0.254: v1(33.9,18.8) 35.15,17.55 v1(35.15,14.5)
pads on no net: J1.2 J2.1 J2.2 J2.5 J2.6 J2.11 J2.MP1 J2.MP2 USB1.2 USB1.3 USB1.4

## Polygon pours and split planes (outlines as drawn)
GND on Top Layer "Top Layer-No Net 1" (solid, pour order 0): -0.127,0 ccw(c0,0) 0,-0.127 42,-0.127 ccw(c42,0) 42.127,0 42.127,40 ccw(c42,40) 42,40.127 0,40.127 ccw(c0,40) -0.127,40
GND on Bottom Layer "Top Layer-No Net" (solid, pour order 2): -0.127,0 ccw(c0,0) 0,-0.127 42,-0.127 ccw(c42,0) 42.127,0 42.127,40 ccw(c42,40) 42,40.127 0,40.127 ccw(c0,40) -0.127,40

## Silkscreen, mask and mechanical layers (free items; w line width, h text height)
Mechanical 8:
  the board outline again, w0.254